# EAGLE board Transistor_as_Amplifier (EAGLE 9.6.2)
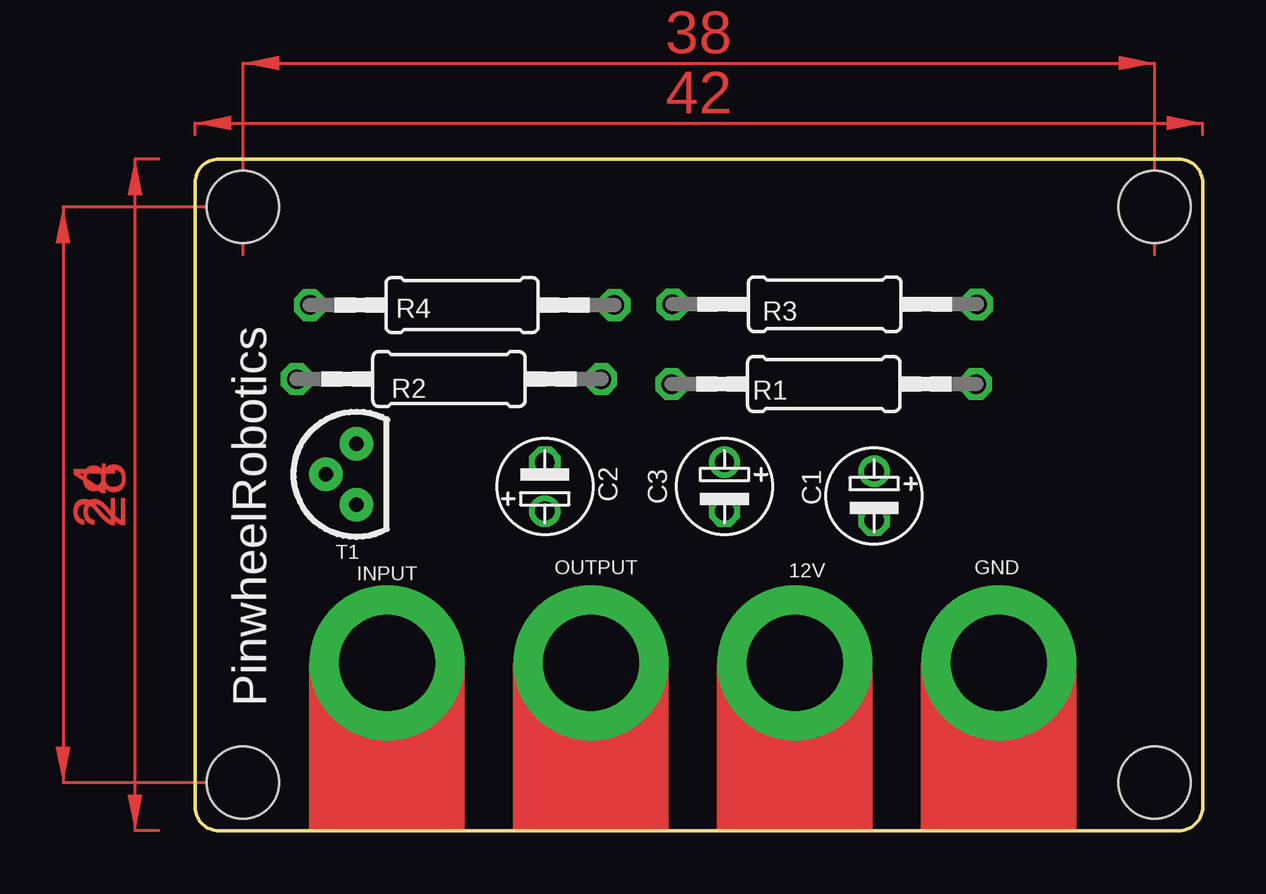
[diagram p0: board, top side]
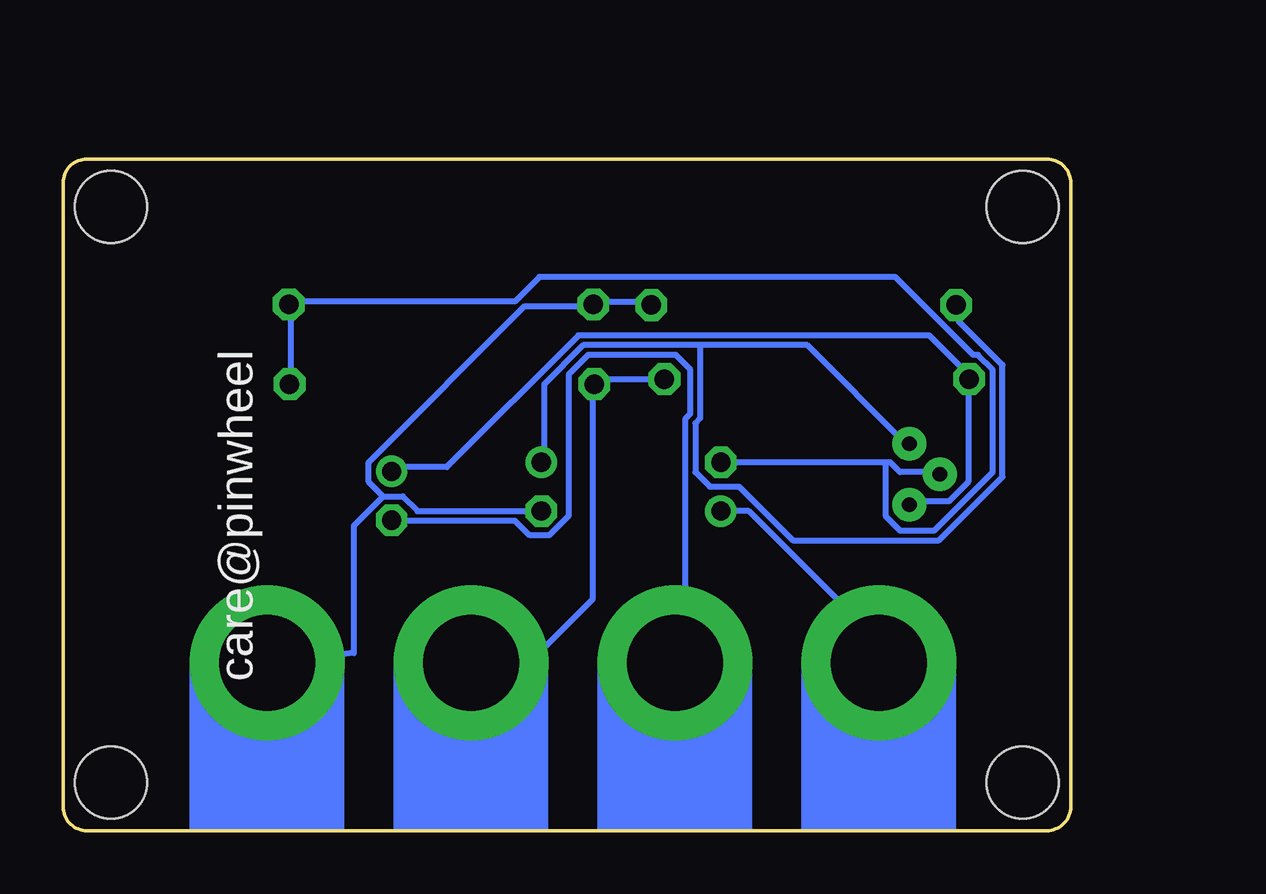
[diagram p1: board, bottom side, seen from below]

Size 42 x 28 mm. Coordinates in mm from the lower left corner, seen from the top.
Outline: 41,28 1,28 arc90 0,27 0,1 arc90 1,0 41,0 arc90 42,1 42,27 arc90 41,28
Copper layers (1*16): Top 0.035mm / dielectric 1.5mm / Bottom 0.035mm
Design rules "default *": minimum track width 10mil, minimum drill 0.35mm, track to track 6mil, track to pad 6mil, pad to pad 6mil, via to via 6mil, smd to smd 6mil, copper to edge 40mil, drill to drill 6mil, minimum pad ring 10mil, minimum via ring 8mil, stop-mask expansion 4mil, vias tented up to drill 0mil, thermal gap 10mil
Holes 3 mm at 2,26 2,2 40,2 40,26

## Footprints (pad centres in the part's own frame; a part is rotated, then mirrored left to right if it is on the bottom)
MICROBIT_PAD = drill 4 pad 6.452: PAD 0,0
C_E2-4 = drill 0.8 pad 1.3: + 0,1.016 | drill 0.8 pad 1.3 octagon: - 0,-1.016
0207/12 = drill 0.813 octagon: 1 -6.35,0; 2 6.35,0
TO92 = drill 0.61 pad 1.397: 1 0,0; 2 1.27,1.27; 3 2.54,0

## Placement (x,y rotation side)
12V  MICROBIT_PAD  [MICROBIT_PAD]  25,7 0 top
C1  10uF  [C_E2-4]  28.31,13.96 0 top
C2  10uF  [C_E2-4]  14.58,14.34 180 top
C3  47uF  [C_E2-4]  22.07,14.34 0 top
GND  MICROBIT_PAD  [MICROBIT_PAD]  33.5,7 0 top
INPUT  MICROBIT_PAD  [MICROBIT_PAD]  8,7 0 top
OUTPUT  MICROBIT_PAD  [MICROBIT_PAD]  16.5,7 0 top
R1  100k  [0207/12]  26.21,18.62 180 top
R2  1k  [0207/12]  10.59,18.83 0 top
R3  150K  [0207/12]  26.25,21.94 0 top
R4  470  [0207/12]  11.13,21.91 180 top
T1  BC547N  [TO92]  6.72,13.59 90 top

## Library data of the parts
12V GND INPUT OUTPUT = microbit
C1-C3 = we-rcl
R1-R4 = rcl; SPICEPREFIX: R
T1 = BC547; AVAILABILITY: In Stock; CHECK_PRICES: https://www.snapeda.com/parts/BC547/Onsemi/view-part/?ref=eda; DESCRIPTION: Trans GP BJT NPN 45V 0.1A 500mW 3-Pin TO-92 T/R; MF: ON Semiconductor; MP: BC547; PACKAGE: None; PRICE: None; PURCHASE-URL: https://www.snapeda.com/api/url_track_click_mouser/?unipart_id=11254981&manufacturer=ON Semiconductor&part_name=BC547&search_term=None; SNAPEDA_LINK: https://www.snapeda.com/parts/BC547/Onsemi/view-part/?ref=snap

## Nets
12V: 12V.PAD R1.2 R2.2
GND: C3.- GND.PAD R3.1 R4.1
N$1: C3.+ R4.2 T1.3
N$2: C1.+ R2.1 T1.1
N$3: C2.- R1.1 R3.2 T1.2
N$4: C1.- OUTPUT.PAD
N$7: C2.+ INPUT.PAD

## Tracks (layer width: path | path; a pad name or v marks a point on that pad's centre or on a via)
12V
  Bottom 0.254: R2.2 17.07,18.81 19.71,18.81 R1.2 19.91,18.61 19.91,9.67 22.2,7.38 12V.PAD
GND
  Bottom 0.254: R4.1 17.68,22.06 19.71,22.06 R3.1 19.91,21.86 22.76,21.86 29.26,15.36 29.26,14.54 28.65,13.94 | C3.- 27.23,13.33 27.84,13.94 28.65,13.94 | 28.65,13.94 29.87,12.72 29.87,7.41 GND.PAD
N$1
  Bottom 0.254: 15.45,20.23 10.97,20.23 6.91,16.17 T1.3 | 15.45,20.23 20.32,20.23 21.95,18.61 21.95,15.36 C3.+ | 15.45,20.23 15.45,17.19 15.65,16.98 15.65,14.95 15.04,14.34 13.82,14.34 11.58,12.11 5.49,12.11 2.85,14.75 2.85,19.42 4.67,21.25 4.67,21.86 R4.2
N$2
  Bottom 0.254: C1.+ 28.25,15.15 26.01,15.15 20.52,20.64 5.89,20.64 4.27,19.02 R2.1 4.27,18.81 4.27,14.54 5.08,13.73 6.71,13.73 T1.1
N$3
  Bottom 0.254: R1.1 32.51,18.81 32.51,21.86 R3.2 32.51,22.06 23.17,22.06 22.15,23.08 7.32,23.08 4.07,19.83 3.86,19.83 3.25,19.22 3.25,14.95 5.69,12.51 7.11,12.51 7.72,13.12 7.72,15.36 | 7.72,15.36 7.52,15.36 7.11,14.95 5.49,14.95 T1.2 | 7.72,15.36 C2.-
N$4
  Bottom 0.254: C1.- 28.25,12.92 23.17,12.92 22.56,12.31 21.74,12.31 20.93,13.12 20.93,19.02 20.12,19.83 16.46,19.83 15.85,19.22 15.85,17.39 16.05,17.19 16.05,8.25 14.85,7.04 OUTPUT.PAD
N$7
  Bottom 0.254: C2.+ 13.41,13.33 8.02,7.93 INPUT.PAD
(copper drawn outside any net)
  shapes: Top area x4

## Text on the board
tPlace: PinwheelRobotics
bPlace: care@pinwheel